# Altium PCB PCBCaneca-smart V2.PcbDoc
Units mm, origin at the board's own origin, x right, y up, seen from the top; angles counter-clockwise.
Board outline 88 x 105 mm, 4 copper layers (Top Layer, GND, VCC, Bottom Layer), stack 1.587 mm thick; 96 components, 50 nets, 244 pads, 111 vias.
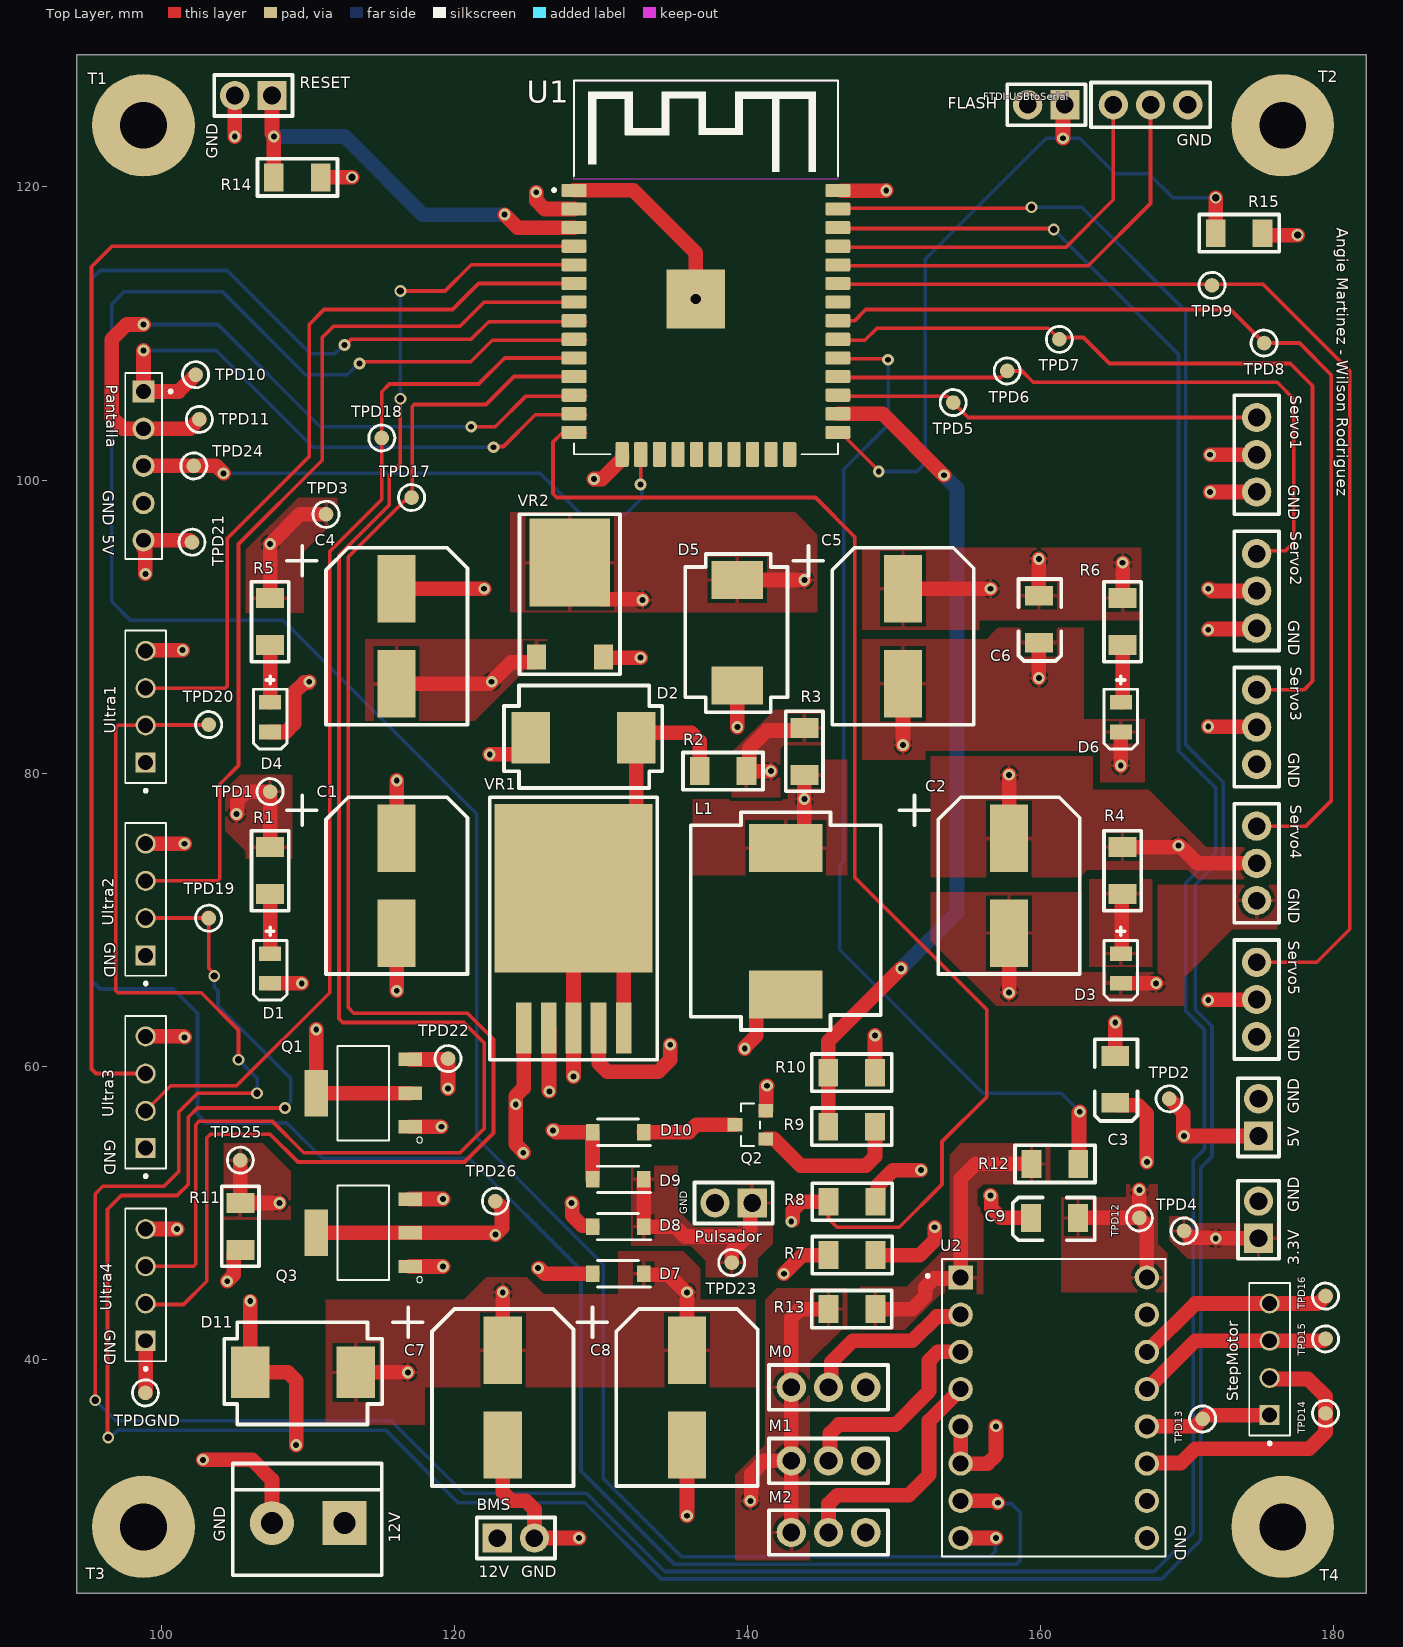
[diagram p0: Top Layer view]
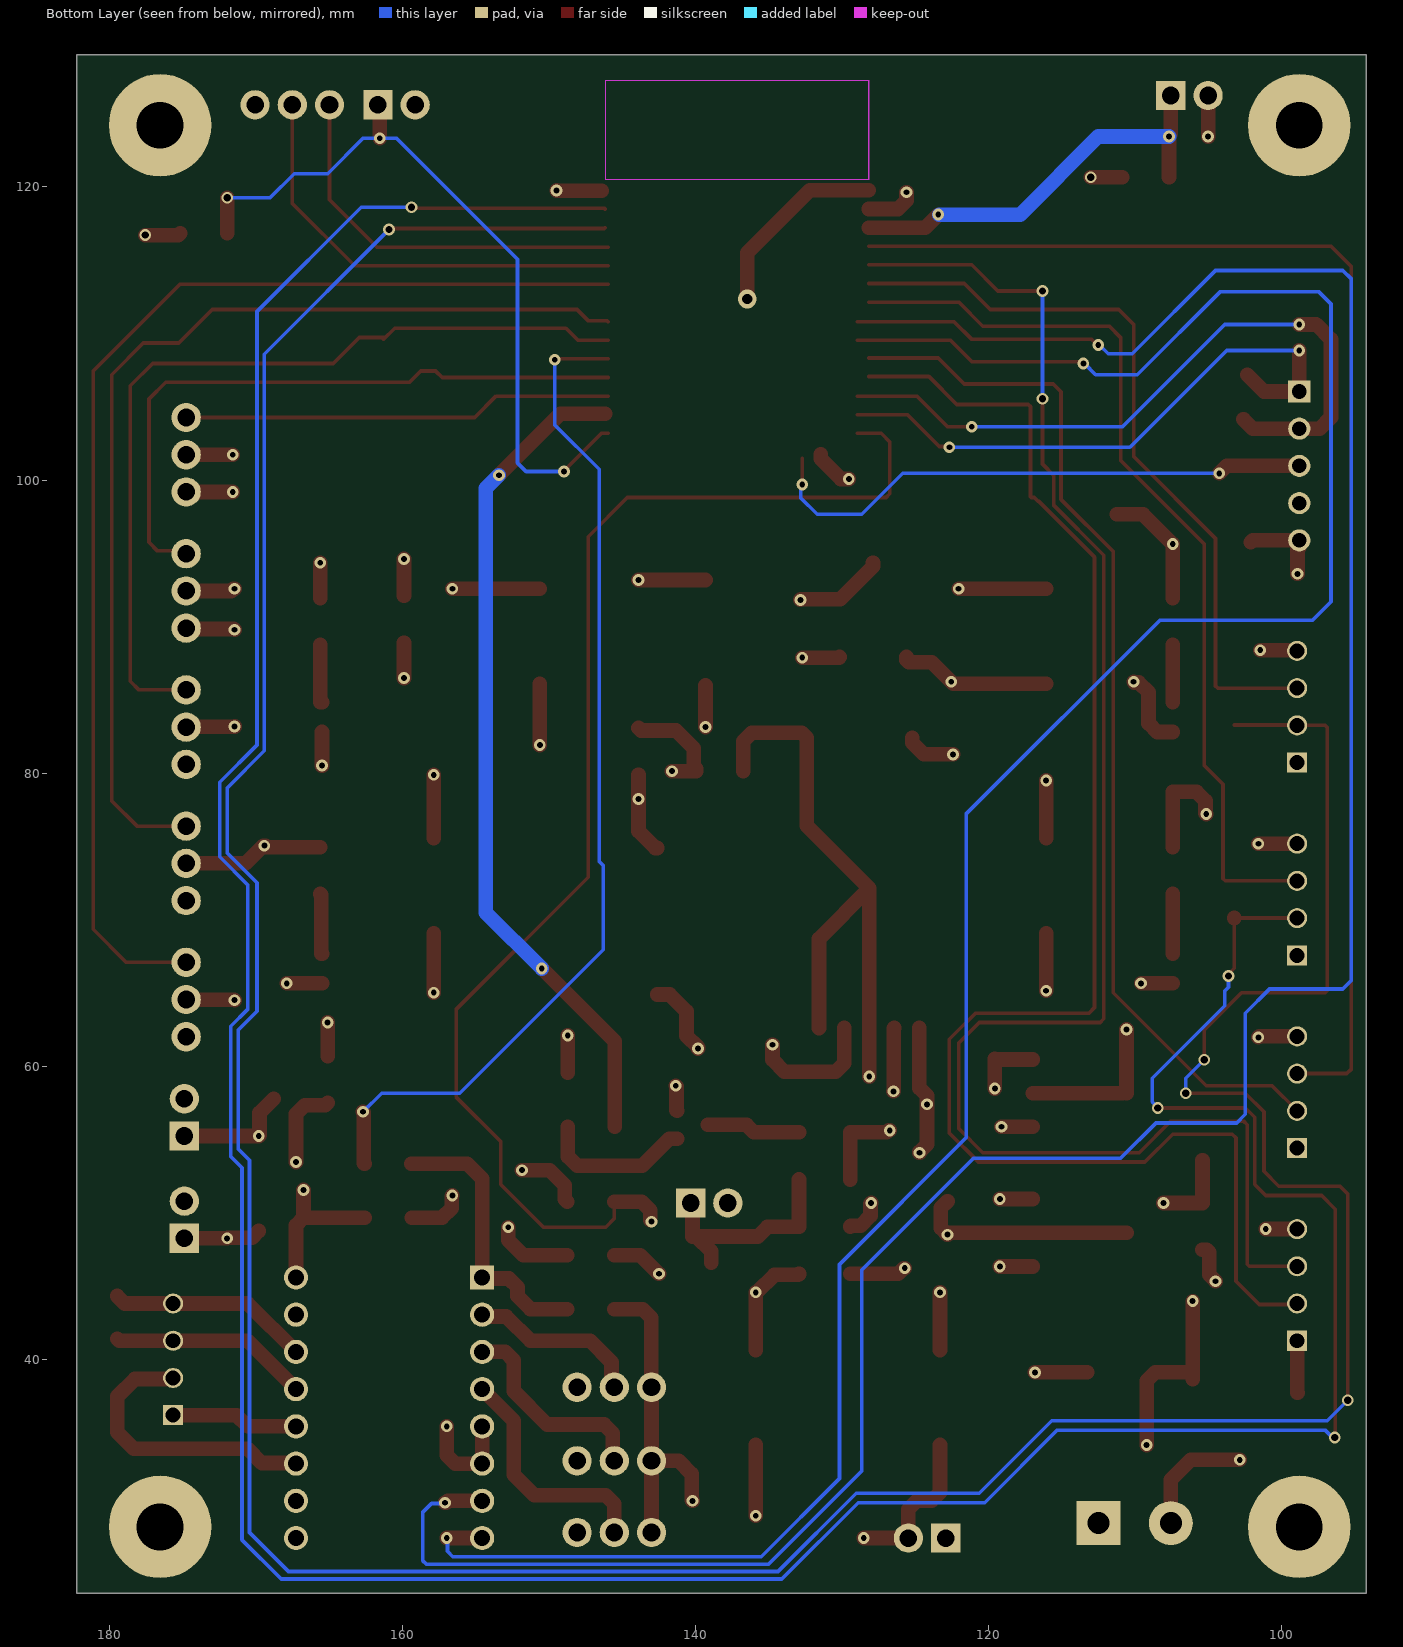
[diagram p1: Bottom Layer view, seen from below]
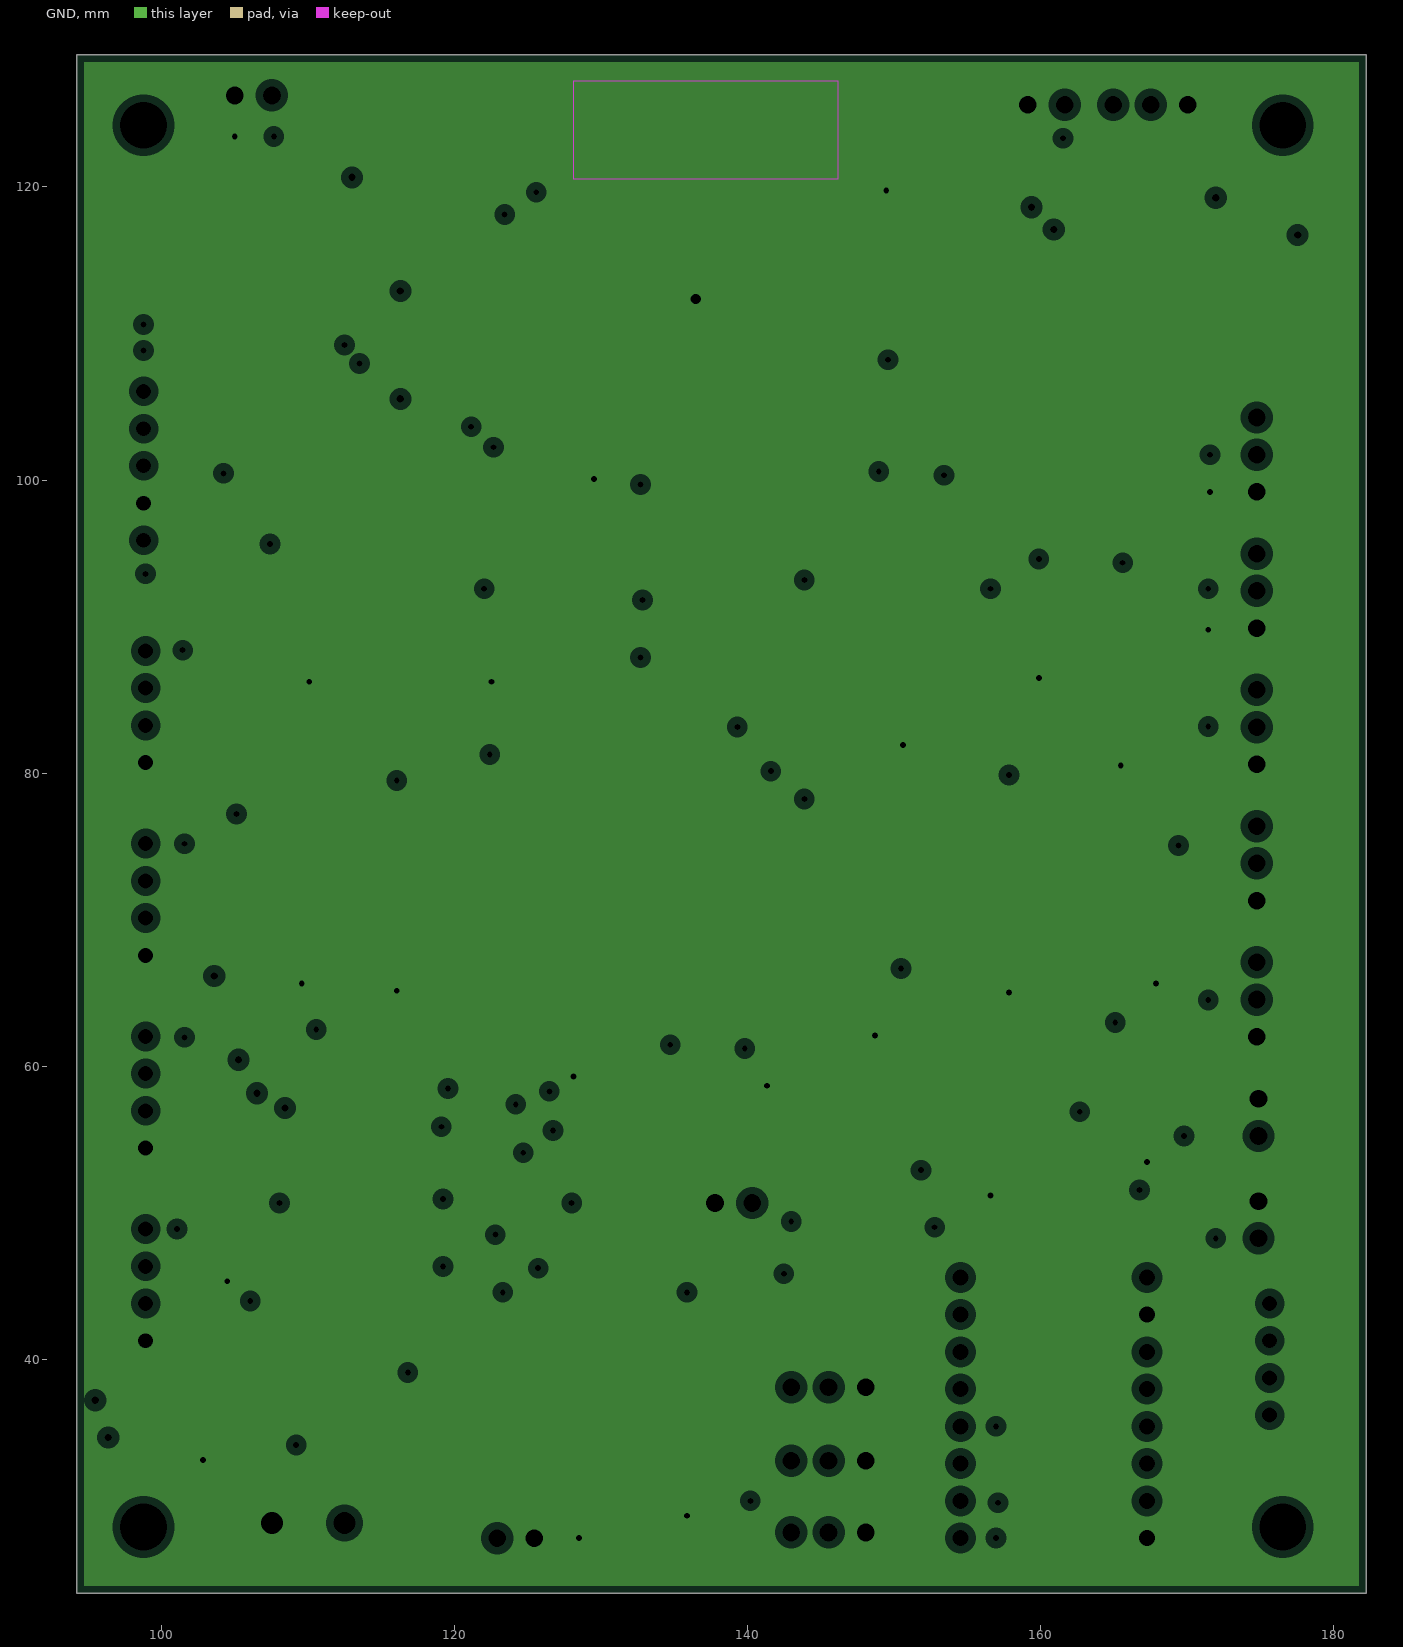
[diagram p2: GND, clearances drawn from the general rule]
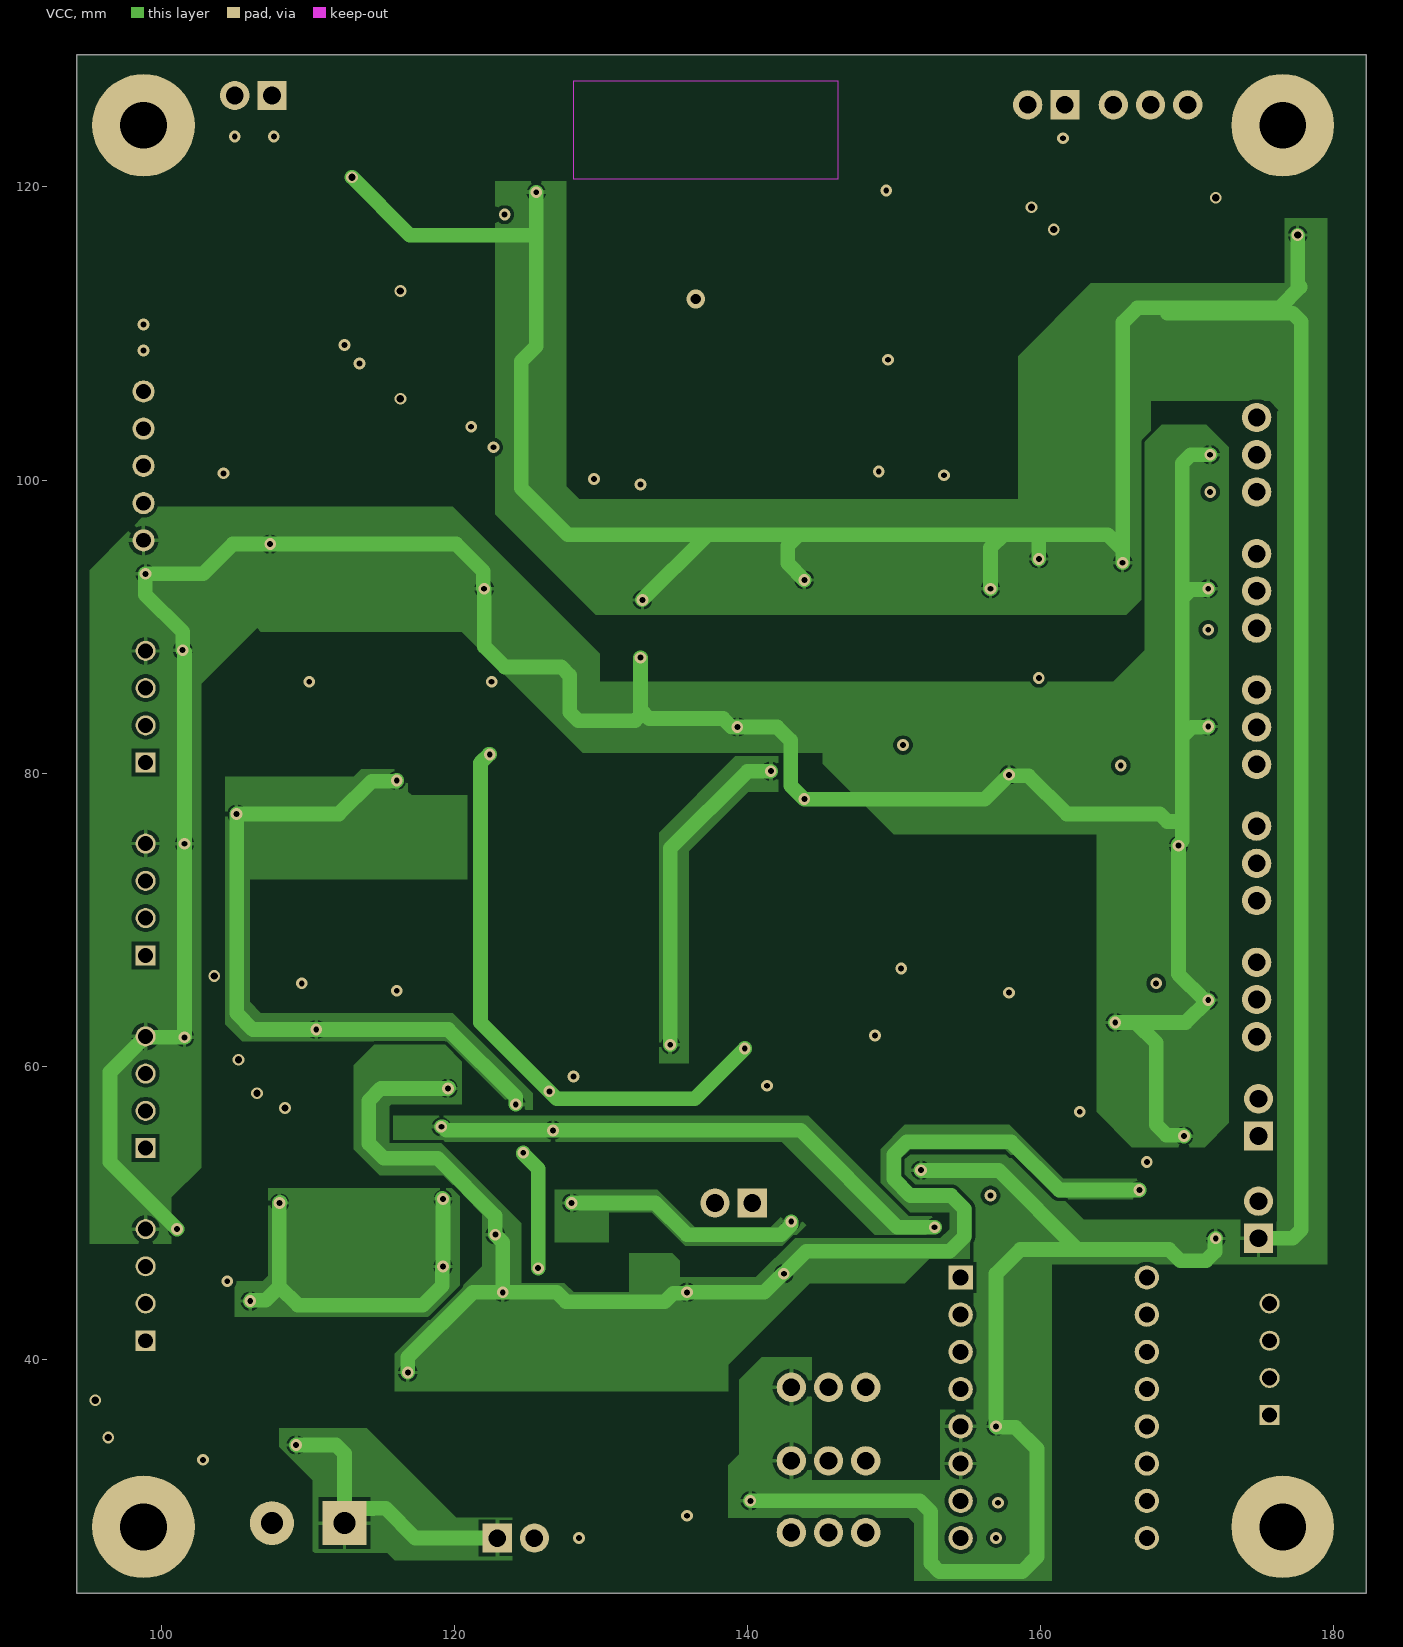
[diagram p3: VCC]
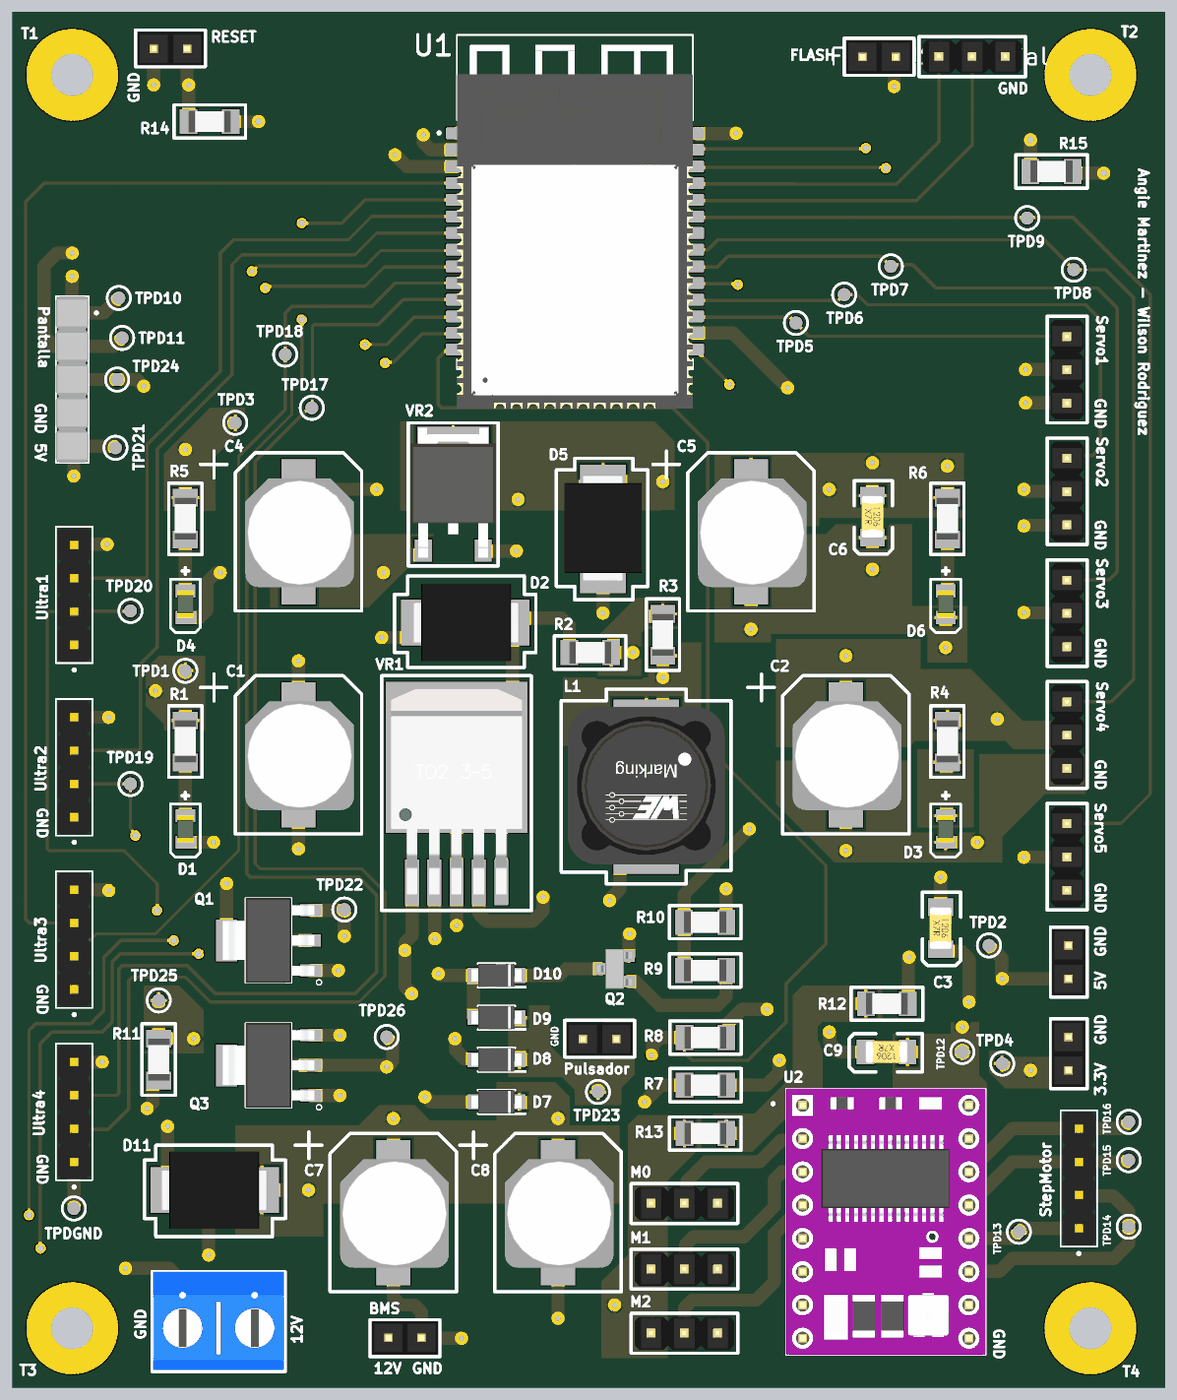
[diagram p4: 3D render of the assembled board from above, using the file's embedded part models]

## Layer stack, top to bottom
Top Solder: solder mask 0.0102, Solder Resist, Dk 3.5
Top Layer: signal copper 0.0356
Dielectric 2: prepreg 0.2103, PP-006, Dk 4.1
GND: plane copper 0.0152, net GND
Dielectric 1: prepreg 1.065, PP-006, Dk 4.1
VCC: signal copper 0.0152
Dielectric 3: prepreg 0.2103, PP-006, Dk 4.1
Bottom Layer: signal copper 0.0356
Bottom Solder: solder mask 0.0102, Solder Resist, Dk 3.5

## Board outline
94.234,24.032 94.234,129.032 182.234,129.032 182.234,24.032

## Design rules (kind name [scope] priority, off if disabled: settings)
Clearance [All] p1: gap=0.254 ignorepadtopadclearanceinfootprint=FALSE
HoleSize [All] p1: absolutevalues=TRUE maxlimit=4 minlimit=0.025 maxpercent=80.000 minpercent=20.000
MinimumSolderMaskSliver [All] p1: minsoldermaskwidth=0.1
PlaneClearance [All] p1: clearance=0.508
PlaneConnect [All] p1: planeconnectstyle=Relief reliefexpansion=0.508 reliefentries=4 reliefconductorwidth=0.254 reliefairgap=0.254
PolygonConnect [All] p1: connectstyle=Relief reliefconductorwidth=0.254 reliefentries=4 polygonreliefangle="90 Angle" airgapwidth=0.254
RoutingVias [All] p1: holewidth=0.4 width=0.8 viastyle="Through Hole" minholewidth=0.5 minwidth=0.55 maxholewidth=6.3 maxwidth=6.5
SilkToSolderMaskClearance [IsPad] p1: minsilkscreentomaskgap=0.15 clearancetoexposedcopper=TRUE
SolderMaskExpansion [All] p1: expansion=0.102 istentingtop=FALSE
Width [All] p1: maxlimit=1 minlimit=0.2 preferedwidth=0.25
25 further rules are at their usual default settings.

## Components (designator, comment, footprint, x,y, rotation, side; value= is the part's Value field where it differs from the comment)
3.3V "Header 1*2" "Header 1X2" 174.879,48.26 r90 top
5V "Header 1*2" "Header 1X2" 174.879,55.245 r90 top
12V "Borne2p" "Terminal block 1x2 izq" 107.569,28.829 r0 top
BMS "Header 1*2" "Header 1X2" 122.936,27.813 r0 top
C1 "CIN" "CAPACITOR ALUMINUM" 116.078,75.565 r0 top value=100uF
C2 "COUT" "CAPACITOR ALUMINUM" 157.861,75.565 r0 top value=220uF
C3 "COUT" CC1206 165.1,60.706 r270 top value=0.1uF
C4 "CIN" "CAPACITOR ALUMINUM" 116.078,92.583 r0 top value=100uF
C5 "COUT" "CAPACITOR ALUMINUM" 150.622,92.583 r0 top value=220uF
C6 "COUT" CC1206 159.893,92.1 r270 top value=0.1uF
C7 "" "CAPACITOR ALUMINUM" 123.317,40.64 r0 top value=220uF
C8 "" "CAPACITOR ALUMINUM" 135.89,40.64 r0 top value=100uF
C9 "" CC1206 162.56,49.657 r180 top value=0.1uF
D1 "LED1" "LED 0805" 107.442,67.691 r270 top
D2 "SS34" "SS34 DIODE" 132.422,82.423 r180 top
D3 "LED2" "LED 0805" 165.481,67.691 r270 top
D4 "LED1" "LED 0805" 107.442,84.836 r270 top
D5 "SS34" "SS34 DIODE" 139.319,93.179 r270 top
D6 "LED2" "LED 0805" 165.481,84.836 r270 top
D7 "1N4007W-T" SODFL3818X130N 131.191,45.847 r180 top
D8 "1N4007W-T" SODFL3818X130N 131.191,49.064 r180 top
D9 "1N4007W-T" SODFL3818X130N 131.191,52.282 r180 top
D10 "1N4007W-T" SODFL3818X130N 131.191,55.499 r180 top
D11 "SS34" "SS34 DIODE" 106.084,39.116 r0 top
FLASH "Header 1*2" "Header 1X2" 161.671,125.603 r180 top
FTDI-USBtoSerial "Header 3" "header 1x3" 164.973,125.603 r0 top
L1 "Inductor" INDUCTOR 142.621,64.897 r90 top value=47mH
M0 "Header 3" "header 1x3" 143.002,38.1 r0 top
M1 "Header 3" "header 1x3" 143.002,33.084 r0 top
M2 "Header 3" "header 1x3" 143.002,28.194 r0 top
Pantalla "Header 5" "HEADER X 5" 98.806,100.965 r270 top
Pulsador "Header 1*2" "Header 1X2" 140.335,50.673 r180 top
Q1 "FDT434P" SOT230P700X180-4N 113.792,58.166 r90 top
Q2 "MMBT3904" MMBT3904 140.208,56.007 r0 top
Q3 "FDT434P" SOT230P700X180-4N 113.792,48.641 r90 top
R1 "Res1" "RESISTOR 1206" 107.442,71.755 r90 top value=330
R2 "Res1" "RESISTOR 1206" 136.754,80.137 r0 top value=1K
R3 "Res1" "RESISTOR 1206" 143.891,83.083 r270 top value=3K
R4 "Res1" "RESISTOR 1206" 165.608,71.755 r90 top value=330
R5 "Res1" "RESISTOR 1206" 107.442,88.748 r90 top value=1K
R6 "Res1" "RESISTOR 1206" 165.608,88.748 r90 top value=1K
R7 "Res1" "RESISTOR 1206" 148.742,47.117 r180 top value=10K
R8 "Res1" "RESISTOR 1206" 148.742,50.758 r180 top value=10K
R9 "Res1" "RESISTOR 1206" 148.717,55.88 r180 top value=220
R10 "Res1" "RESISTOR 1206" 148.717,59.563 r180 top value=10K
R11 "Res1" "RESISTOR 1206" 105.41,50.673 r270 top value=100K
R12 "Res1" "RESISTOR 1206" 162.585,53.34 r180 top value=100
R13 "Res1" "RESISTOR 1206" 145.542,43.434 r0 top value=10K
R14 "Res1" "RESISTOR 1206" 110.896,120.65 r180 top value=10K
R15 "Res1" "RESISTOR 1206" 175.158,116.84 r180 top value=10K
RESET "Header 1*2" "Header 1X2" 107.569,126.238 r180 top
Servo1 "Header 3" "header 1x3" 174.752,99.187 r90 top
Servo2 "Header 3" "header 1x3" 174.752,89.894 r90 top
Servo3 "Header 3" "header 1x3" 174.752,80.602 r90 top
Servo4 "Header 3" "header 1x3" 174.752,71.309 r90 top
Servo5 "Header 3" "header 1x3" 174.752,62.016 r90 top
StepMotor "Header 4" "HEADER 1X4" 175.641,36.195 r90 top
T1 "Tornillo" TORNILLO 98.806,124.206 r0 top
T2 "Tornillo" TORNILLO 176.53,124.206 r0 top
T3 "Tornillo" TORNILLO 98.806,28.575 r0 top
T4 "Tornillo" TORNILLO 176.53,28.575 r0 top
TPD1 "" "TESTPOINT SMT" 107.442,78.74 r90 top
TPD2 "" "TESTPOINT SMT" 168.783,57.785 r90 top
TPD3 "" "TESTPOINT SMT" 111.252,97.663 r90 top
TPD4 "" "TESTPOINT SMT" 169.799,48.768 r90 top
TPD5 "" "TESTPOINT SMT" 154.051,105.283 r90 top
TPD6 "" "TESTPOINT SMT" 157.734,107.442 r90 top
TPD7 "" "TESTPOINT SMT" 161.29,109.601 r90 top
TPD8 "" "TESTPOINT SMT" 175.26,109.347 r90 top
TPD9 "" "TESTPOINT SMT" 171.704,113.284 r90 top
TPD10 "" "TESTPOINT SMT" 102.362,107.188 r90 top
TPD11 "" "TESTPOINT SMT" 102.616,104.14 r90 top
TPD12 "" "TESTPOINT SMT" 166.751,49.657 r90 top
TPD13 "" "TESTPOINT SMT" 171.069,35.941 r90 top
TPD14 "" "TESTPOINT SMT" 179.451,36.322 r90 top
TPD15 "" "TESTPOINT SMT" 179.451,41.402 r90 top
TPD16 "" "TESTPOINT SMT" 179.451,44.323 r90 top
TPD17 "" "TESTPOINT SMT" 117.094,98.806 r90 top
TPD18 "" "TESTPOINT SMT" 115.062,102.87 r90 top
TPD19 "" "TESTPOINT SMT" 103.251,70.104 r90 top
TPD20 "" "TESTPOINT SMT" 103.251,83.312 r90 top
TPD21 "" "TESTPOINT SMT" 102.108,95.758 r90 top
TPD22 "" "TESTPOINT SMT" 119.578,60.523 r90 top
TPD23 "" "TESTPOINT SMT" 138.938,46.609 r90 top
TPD24 "" "TESTPOINT SMT" 102.235,100.965 r90 top
TPD25 "" "TESTPOINT SMT" 105.41,53.594 r90 top
TPD26 "" "TESTPOINT SMT" 122.809,50.8 r90 top
TPDGND "" "TESTPOINT SMT" 98.933,37.719 r90 top
U1 "ESP-WROOM-32" MODULE_ESP-WROOM-32 137.177,111.506 r0 top
U2 "DRV8825_STEPPER_MOTOR_DRIVER_CARRIER" IC_DRV8825_STEPPER_MOTOR_DRIVER_CARRIER 160.909,36.703 r0 top
Ultra1 "Header 4" "HEADER 1X4" 98.953,80.723 r90 top
Ultra2 "Header 4" "HEADER 1X4" 98.953,67.574 r90 top
Ultra3 "Header 4" "HEADER 1X4" 98.953,54.424 r90 top
Ultra4 "Header 4" "HEADER 1X4" 98.953,41.275 r90 top
VR1 "LM2596S-ADJ" lm2596S 128.143,62.992 r270 top
VR2 "LM1117DT-3.3" LM1117DT-3.3 127.889,94.361 r0 top

## Footprints (in the part's own frame and the unit in brackets; to place one, negate y for a bottom-side part, rotate by r counter-clockwise, add the part's x,y. Pads: shape width x height; smd on the part's side, far side on the other; paste and mask are expansions set on the pad)
"CAPACITOR ALUMINUM" [mm]
  rect 2.6x4.6 smd: 1(0,0) 2(0,-6.477)
  silkscreen extent -7.49,-9.27 4.83,2.92, body extent -4.06,-7.45 4.24,0.85, height 12
CC1206 [mm]
  rect 1.35x1.9 smd: 1(0,0) 2(3.2,0)
  silkscreen extent -1.14,-1.4 4.44,1.52, body extent 0,-0.85 3.2,0.85, height 1.7
"Header 1X2" [mm]
  rect 2x2 hole 1.2: 1(0,0)
  round 2 hole 1.2: 2(2.54,0)
  silkscreen extent -1.4,-1.4 3.94,1.4, body extent -1.27,-1.24 3.81,1.3, height 2.09
"header 1x3" [mm]
  round 2 hole 1.2: 1(0,0) 2(2.54,0) 3(5.08,0)
  silkscreen extent -1.52,-1.52 6.6,1.52, body extent -1.27,-1.27 6.35,1.27, height 9.2
"HEADER 1X4" [mm]
  rect 1.37x1.37 hole 1.02: 1(0,0)
  round 1.37 hole 1.02: 2(2.54,0) 3(5.08,0) 4(7.62,0)
  silkscreen extent -2.02,-1.4 9.02,1.4, body extent -1.27,-1.27 8.89,1.27, height 8.89
"HEADER X 5" [mm]
  rect 1.508x1.508 / inner round 1.508 / far side rect 1.508x1.508 hole 1: 1(-5.08,0)
  round 1.508 hole 1: 2(-2.54,0) 3(0,0) 4(2.54,0) 5(5.08,0)
  silkscreen extent -6.35,-1.25 6.35,1.95, body extent -6.35,-1.25 6.35,1.25, height 8.85
IC_DRV8825_STEPPER_MOTOR_DRIVER_CARRIER [mm]
  rect 1.65x1.65 hole 1.1: 1(-6.35,8.89)
  round 1.65 hole 1.1: 2(-6.35,6.35) 3(-6.35,3.81) 4(-6.35,1.27) 5(-6.35,-1.27) 6(-6.35,-3.81) 7(-6.35,-6.35) 8(-6.35,-8.89) 9(6.35,-8.89) 10(6.35,-6.35) 11(6.35,-3.81) 12(6.35,-1.27) 13(6.35,1.27) 14(6.35,3.81) 15(6.35,6.35) 16(6.35,8.89)
  silkscreen extent -8.7,-10.16 7.62,10.16, body extent -7.62,-10.16 7.62,10.16, height 5.89
INDUCTOR [mm]
  rect 3.3x5 smd: 1(0,0) 2(10,0)
  silkscreen extent -2.41,-6.48 12.45,6.48, body extent -0.92,-6 11.08,6, height 9.46
"LED 0805" [mm]
  rect 1x1.5 smd: 1(0,0) 2(2.032,0)
  silkscreen extent -1.78,-1.14 3.17,1.14, body extent 0,-0.64 2.03,0.64, height 1.1
LM1117DT-3.3 [mm]
  rect 1.3x1.7 smd: 1(-2.286,-6.44) 3(2.286,-6.44)
  rect 5.5x6 smd: 2(0,0)
  silkscreen extent -3.43,-7.62 3.43,3.3, body extent -3.29,-6.99 3.29,2.92, height 2.5
lm2596S [mm]
  rect 3.5x1.07 smd: 1(0.381,-3.4) 2(0.381,-1.7) 3(0.381,0) 4(0.381,1.7) 5(0.381,3.429)
  rect 11.5x10.8 smd: 6(-9.144,0)
  silkscreen extent -15.37,-5.72 2.54,5.72, body extent -14.36,-5 1.31,5, height 4.78
MMBT3904 [mm]
  rect 1x0.9 smd: 1(1.05,-0.96) 2(1.05,0.96) 3(-1.05,0)
  silkscreen extent -0.65,-1.45 0.65,1.45, body extent -1.3,-1.52 1.3,1.52, height 1.28
MODULE_ESP-WROOM-32 [mm]
  rrect22% 1.7x0.9 smd: 1(-9,8.255) 2(-9,6.985) 3(-9,5.715) 4(-9,4.445) 5(-9,3.175) 6(-9,1.905) 7(-9,0.635) 8(-9,-0.635) 9(-9,-1.905) 10(-9,-3.175) 11(-9,-4.445) 12(-9,-5.715) 13(-9,-6.985) 14(-9,-8.255) 25(9,-8.255) 26(9,-6.985) 27(9,-5.715) 28(9,-4.445) 29(9,-3.175) 30(9,-1.905) 31(9,-0.635) 32(9,0.635) 33(9,1.905) 34(9,3.175) 35(9,4.445) 36(9,5.715) 37(9,6.985) 38(9,8.255)
  rect 4x4 smd: 1.1(-0.7,0.845)
  rrect22% 0.9x1.7 smd: 15(-5.715,-9.755) 16(-4.445,-9.755) 17(-3.175,-9.755) 18(-1.905,-9.755) 19(-0.635,-9.755) 20(0.635,-9.755) 21(1.905,-9.755) 22(3.175,-9.755) 23(4.445,-9.755) 24(5.715,-9.755)
  Keep-Out Layer region: 9,9.012 -9.012,9.012 -9.012,15.75 9,15.75
  Keep-Out Layer region: 9,9.026 -9.026,9.026 -9.026,15.75 9,15.75
  silkscreen extent -10.46,-9.75 9,15.75, body extent -9,-12.75 9,12.75, height 3.25
"RESISTOR 1206" [mm]
  rect 1.35x1.9 smd: 1(0,0) 2(3.2,0)
  silkscreen extent -1.14,-1.27 4.32,1.27, body extent 0,-0.83 3.2,0.83, height 0.53
SODFL3818X130N [mm]
  rect 0.92x1.13 smd: 1(-1.75,0) 2(1.75,0)
  silkscreen extent -2.21,-0.9 1.4,0.9, body extent -1.9,-0.9 1.9,0.9, height 1.3
SOT230P700X180-4N [mm]
  rect 0.92x1.61 smd: 1(-2.3,-3.2) 2(0,-3.2) 3(2.3,-3.2)
  rect 3.19x1.61 smd: 4(0,3.2)
  silkscreen extent -3.4,-4.05 3.22,1.75, body extent -3.25,-3.5 3.25,3.5, height 1.8
"SS34 DIODE" [mm]
  rect 2.6x3.5 smd: 1(0,0) 2(7.2,0)
  silkscreen extent -1.78,-3.56 9.02,3.43, body extent -0.48,-2.95 7.59,2.95, height 2.53
"Terminal block 1x2 izq" [mm]
  rect 3x3 hole 1.5: 1(4.953,0)
  round 3 hole 1.5: 2(0,0)
  silkscreen extent -2.67,-3.56 7.49,4.06, body extent -2.59,-3.44 7.41,4.06, height 10
"TESTPOINT SMT" [mm] "Test Point, Dia 3.17mm"
  round 1 smd: 1(0,0)
  silkscreen extent -0.89,-0.89 0.89,0.89
TORNILLO [mm]
  round 7 hole 3.2: 1(0,0)

## Part data
12V: library part "Header 2", "Header, 2-Pin", LatestRevisionDate=17-Jul-2002, LatestRevisionNote="Re-released for DXP Platform.", Publisher="Altium Limited"
C1 C4 C8: library part "Cap Pol1", "Polarized Capacitor (Radial)", LatestRevisionDate=17-Jul-2002, LatestRevisionNote="Re-released for DXP Platform.", PackageDescription="Polarized Capacitor (Radial); 2 Leads", PackageReference=RB7.6-15, Published=8-Jun-2000, Publisher="Altium Limited"
C2 C5 C7: library part "Cap Pol1_1", "Polarized Capacitor (Radial)", LatestRevisionDate=17-Jul-2002, LatestRevisionNote="Re-released for DXP Platform.", PackageDescription="Polarized Capacitor (Radial); 2 Leads", PackageReference=RB7.6-15, Published=8-Jun-2000, Publisher="Altium Limited"
C3 C6 C9: library part "Cap Pol1_2", "Polarized Capacitor (Radial)", LatestRevisionDate=17-Jul-2002, LatestRevisionNote="Re-released for DXP Platform.", PackageDescription="Polarized Capacitor (Radial); 2 Leads", PackageReference=RB7.6-15, Published=8-Jun-2000, Publisher="Altium Limited"
D1: library part LED0_1, "Typical INFRARED GaAs LED", LatestRevisionDate=08-Jul-2005, LatestRevisionNote="Mech Layer 1 removed.", PackageDescription="LED; 2 Leads", PackageReference=LED-0, Published=8-Jun-2000, Publisher="Altium Limited"
D2 D5 D11: library part CMP-02539-000012-1, "DIODE SCHOTTKY 40V 3A DO214AB", Forward Current=3A, Manufacturer=Vishay, Manufacturer Part Number=SS34-E3/57T, Max Junction Temp=+150°C, Max Repetitive Reverse Voltage=40V, Max Surge Forward Current=100A, Package=95402, Peak Reverse Current=0.5mA, Temperature="-55°C to +150°C", Temperature Range Low=-55°C, Automotive=No, Category=Diode, ComponentLink2Description=Datasheet, ComponentLink2URL=http://www.vishay.com/docs/88751/ss32.pdf, Device Class L1="Discrete Semiconductors", Device Class L2=Diodes, Device Class L3="Schottky Diodes", Digikey Description="DIODE SCHOTTKY 40V 3A DO214AB", Footprint Url=http://www.vishay.com/docs/95402/smc.pdf, Height=2.62mm, Lead Free=Yes, Mouser Description="Schottky Diodes & Rectifiers 3.0 Amp 40 Volt", Octopart=https://octopart.com/ss34-e3%2F57t-vishay-39552907, RoHS=TRUE, Standoff Height=0mm, Temperature Range High=+150°C
D3 D4 D6: library part LED0, "Typical INFRARED GaAs LED", LatestRevisionDate=08-Jul-2005, LatestRevisionNote="Mech Layer 1 removed.", PackageDescription="LED; 2 Leads", PackageReference=LED-0, Published=8-Jun-2000, Publisher="Altium Limited"
D7 D8 D9 D10: "STANDARD SOD123FL T/R 3000", Package="DO-214AA-214 EIC", Check_prices=https://www.snapeda.com/parts/1N4007W/EIC+Semiconductor/view-part/?ref=eda, MF=EIC, MP=1N4007W, SnapEDA_Link=https://www.snapeda.com/parts/1N4007W/EIC+Semiconductor/view-part/?ref=snap
Pantalla: "Board-To-Board Connector, Through Hole, Header, 5, 2.54 mm, Gold Plated Contacts", Package=None, Check_prices=https://www.snapeda.com/parts/826646-5/TE+Connectivity+AMP+Connectors/view-part/?ref=eda, EU_RoHS_Compliance=Compliant, MF="TE Connectivity", MP=826646-5, SnapEDA_Link=https://www.snapeda.com/parts/826646-5/TE+Connectivity+AMP+Connectors/view-part/?ref=snap
Q1 Q3: "P-Channel 20 V 6A (Ta) 3W (Ta) Surface Mount SOT-223-4", Package="SOT-223-4 Fairchild Semiconductor", Check_prices=https://www.snapeda.com/parts/FDT434P/Onsemi/view-part/?ref=eda, MF=ON, MP=FDT434P, SnapEDA_Link=https://www.snapeda.com/parts/FDT434P/Onsemi/view-part/?ref=snap
R1 R4: library part Res1_2, "Resistor", LatestRevisionDate=17-Jul-2002, LatestRevisionNote="Re-released for DXP Platform.", PackageDescription="Axial Device, Thru-Hole; 2 Leads; 0.3 in Pin Spacing", PackageReference=AXIAL-0.3, Published=8-Jun-2000, Publisher="Altium Limited"
R2 R5 R6 R7 R8 R9 R10 R11 R12 R13 R14 R15: "Resistor", LatestRevisionDate=17-Jul-2002, LatestRevisionNote="Re-released for DXP Platform.", PackageDescription="Axial Device, Thru-Hole; 2 Leads; 0.3 in Pin Spacing", PackageReference=AXIAL-0.3, Published=8-Jun-2000, Publisher="Altium Limited"
R3: library part Res1_1, "Resistor", LatestRevisionDate=17-Jul-2002, LatestRevisionNote="Re-released for DXP Platform.", PackageDescription="Axial Device, Thru-Hole; 2 Leads; 0.3 in Pin Spacing", PackageReference=AXIAL-0.3, Published=8-Jun-2000, Publisher="Altium Limited"
StepMotor Ultra1 Ultra2 Ultra3 Ultra4: Package=None, Availability=Unavailable, MF="{'manufacturer': 'TE Connectivity'}", MP=640453-4, Price=None
TPD1 TPD2 TPD3 TPD4 TPD5 TPD6 TPD7 TPD8 TPD9 TPD10 TPD11 TPD12 TPD13 TPD14 TPD15 TPD16 TPD17 TPD18 TPD19 TPD20 TPD21 TPD22 TPD23 TPD24 TPD25 TPD26 TPDGND: library part TestPointRed, "Test Point, Red, Through Hole, RoHS, Bulk", Colour=Red, Manufacturer=Keystone, Package Quantity=100, ComponentLink1Description="Manufacturer URL", ComponentLink1URL=http://www.keyelco.com/, ComponentLink2Description=Datasheet, ComponentLink2URL=http://www.keyelco.com/product-pdf.cfm?p=1319, Contact Material=Bronze, Contact Plating=Silver, DatasheetVersion="Rev. F, 12/2013", Height="8.12 mm", Mount="Through Hole", Mounting Technology="Through Hole", PackageDescription="1-Pin Through Hole Device, Dia 3.17 mm", PackageReference=5010, Packaging=Bulk, Pins=1, REACH SVHC="No SVHC", RoHSCompliant=true
U1: "Transceptor serie ESP-WROOM-32; Placa de evaluaciÃ³n 802.11 b/g/n (Wi-Fi, WiFi, WLAN), BluetoothÂ® Smart 4.x de bajo consumo (BLE)", Package="Module Espressif Systems", Check_prices=https://www.snapeda.com/parts/ESP-WROOM-32/Espressif+Systems/view-part/?ref=eda, MF="Espressif Systems", MP=ESP-WROOM-32, SnapEDA_Link=https://www.snapeda.com/parts/ESP-WROOM-32/Espressif+Systems/view-part/?ref=snap
U2: "Stepper motor controler; IC: DRV8825; 1.5A; Uin mot: 8.2Ã·45V", Package=None, Availability=Unavailable, MP=DRV8825_STEPPER_MOTOR_DRIVER_CARRIER, Price=None
VR1: "SIMPLE SWITCHER® Power Converter 150 KHz 3A Step-Down Voltage Regulator, 5-pin TO-263", Manufacturer="National Semiconductor", Manufacturer Part Number=LM2596SADJ, PackageTopMarking="NSUZXYTTE#*LM2596S*-ADJ P+", PowerWise=N, Code_JEDEC=MO-169-AB, ComponentLink1Description="LM2596 Datasheet", ComponentLink1URL=http://www.national.com/ds/LM/LM2596.pdf, ComponentLink2Description="LM2596 Web Page", ComponentLink2URL=http://www.national.com/pf/LM/LM2596.html, ComponentLink3Description="TS5B Package Page", ComponentLink3URL=http://www.national.com/packaging/folders/ts5b.html, CompType=Switcher, DatasheetVersion=May-2002, PackageDescription="TO-263, Molded, .400 x .390 x .180in, 5 Lead, .067in Pitch, Surface Mount", PackageReference=TS5B, PackageVersion="revD, Apr-2005", PinCount=5, RevisionNote="Component URLs added", RoHS=N
VR2: "800mA Low-Dropout Linear Regulator, 3-pin TO-252", Manufacturer="National Semiconductor", PackageTopMarking=NSUZXYTT*LM1117*DT-3.3, PowerWise=N, Code_JEDEC=TO-252-AA, ComponentLink1Description="LM1117 Datasheet", ComponentLink1URL=http://www.national.com/ds/LM/LM1117.pdf, ComponentLink2Description="LM1117 Web Page", ComponentLink2URL=http://www.national.com/pf/LM/LM1117.html, ComponentLink3Description="TD03B Package Page", ComponentLink3URL=http://www.national.com/packaging/folders/td03b.html, CompType="LDO IC", DatasheetVersion=Apr-2006, Manufacturer Part Number=LM1117DT-3.3, PackageDescription="TO252, Molded, Jedec, 6.8 x 6.10 x 2.30mm Body, 3 Lead, 2.28mm Pitch, Surface Mount", PackageReference=TD03B, PackageVersion="revD, Feb-2009", PinCount=3, RevisionNote="Component URLs added", RoHS=N
L1: Code_IEC=1005, Code_JEITA=0402, LatestRevisionDate=29-May-2009, LatestRevisionNote="IPC-7351 Footprint Added.", PackageDescription="Chip Inductor", PackageReference=0402-A, Published=8-Jun-2000, Publisher="Altium Limited"
Q2: Check_prices=https://www.snapeda.com/parts/MMBT3904/STMicroelectronics/view-part/?ref=eda, SnapEDA_Link=https://www.snapeda.com/parts/MMBT3904/STMicroelectronics/view-part/?ref=snap

## Via types
v1: diameter 0.8, hole 0.4, Top Layer to Bottom Layer, 97 vias
v2: diameter 0.8, hole 0.5, Top Layer to Bottom Layer, 13 vias
v3: diameter 1.27, hole 0.711, Top Layer to Bottom Layer, 1 vias

## Nets (pads, with @x,y where several pads share a name; then routed paths per layer and width w, separated by ;. In a path a pad name is that pad's centre, name@x,y a point inside that pad or via, vN(x,y) a via of type N, cw(c..) or ccw(c..) an arc to the next point about the centre after c; other vN are vias at no path point)
3V3: 3.3V.1 C5.1 C6.1 D5.1 M0.1 M1.1 M2.1 R6.2 R8.1 R13.1 R14.1 R15.1 TPD4.1 U1.2 U2.5 U2.6 VR2.2 | length 344.7
  Top Layer w1: R14.1 v2(113.03,120.65) ; v1(125.603,119.634) 125.603,119.077 126.189,118.491 U1.2 ; VR2.2 127.889,94.111 130.139,91.861 132.802,91.861 v1(132.842,91.821) ; D5.1 v1(143.891,93.179) ; v1(140.208,30.353) 140.26,30.405 140.26,32.183 141.16,33.084 M1.1 M0.1 143.01,38.108 143.01,42.848 143.596,43.434 R13.1 ; M2.1 M1.1@143.002,33.02 ; R8.1 148.917,50.933 148.917,51.889 149.941,52.913 v1(151.846,52.913) ; C5.1 v1(156.591,92.583) ; U2.5 U2.6 156.386,32.893 156.972,33.479 v1(156.972,35.433) ; C6.1 v1(159.893,94.615) ; R6.2 v1(165.608,94.361) ; TPD4.1 170.255,48.312 171.906,48.312 v1(171.958,48.26) 3.3V.1 ; R15.1 175.285,116.713 v2(177.546,116.713)
  VCC w1: v2(113.03,120.65) 116.967,116.713 125.603,116.713 ; v1(125.603,119.634) 125.603,116.713 ; v1(132.842,91.821) 137.16,96.139 ; v1(140.208,30.353) 151.765,30.353 152.527,29.591 152.527,26.113 153.113,25.527 158.75,25.527 159.766,26.543 159.766,33.909 158.294,35.381 157.024,35.381 v1(156.972,35.433) 156.972,45.847 158.623,47.498 162.56,47.498 ; 143.383,96.139 142.748,95.504 142.748,94.322 v1(143.891,93.179) ; v1(151.846,52.913) 151.865,52.894 157.164,52.894 162.56,47.498 ; v1(156.591,92.583) 156.591,95.377 157.48,96.266 ; v1(159.893,94.615) 159.893,96.139 ; 165.556,95.302 164.592,96.266 157.48,96.266 ; v1(165.608,94.361) 165.608,110.744 166.624,111.76 176.319,111.76 177.734,113.174 177.546,113.362 v2(177.546,116.713) ; 168.656,111.379 177.214,111.379 177.8,110.793 177.8,48.846 177.214,48.26 3.3V.1 ; v1(171.958,48.26) 171.906,48.208 171.906,47.351 171.291,46.736 169.545,46.736 168.783,47.498 162.56,47.498 ; 125.603,116.713 125.603,109.12 124.587,108.104 124.587,99.441 127.762,96.266 157.48,96.266
5V: 5V.1 C2.1 C3.1 C4.1 D5.2 L1.2 Pantalla.5 R3.2 R4.2 R5.2 Servo1.2 Servo2.2 Servo3.2 Servo4.2 Servo5.2 TPD2.1 TPD3.1 TPD21.1 Ultra1.4 Ultra2.4 Ultra3.4 Ultra4.4 VR2.3 | length 282
  Top Layer w1: Pantalla.5@98.806,95.377 Pantalla.5 ; Pantalla.5@98.836,95.788 98.933,95.885 101.981,95.885 TPD21.1 ; v1(98.933,93.599) Pantalla.5@98.933,95.377 ; Ultra4.4 v1(101.092,48.895) ; Ultra3.4 101.532,62.044 v1(101.6,61.976) ; Ultra2.4 101.59,75.194 v1(101.6,75.184) ; Ultra1.4 99.002,88.392 v1(101.473,88.392) ; R5.2 v1(107.442,95.631) 109.474,97.663 TPD3.1 ; C4.1 v1(122.047,92.583) ; VR2.3 130.212,87.884 v1(132.715,87.884) ; v1(139.319,83.146) D5.2 ; L1.2 142.741,74.897 143.891,76.047 v1(143.891,78.232) R3.2 ; C2.1 v1(157.861,79.883) ; C3.1 v1(165.1,62.992) ; R4.2 169.243,74.955 169.345,75.057 v1(169.418,75.057) 169.491,75.057 170.699,73.849 Servo4.2 ; TPD2.1 169.747,56.821 169.747,55.297 v1(169.799,55.245) 5V.1 ; v1(171.45,64.516) 171.47,64.536 174.732,64.536 Servo5.2 ; v1(171.45,83.185) 171.472,83.163 174.73,83.163 Servo3.2 ; v1(171.45,92.583) 171.523,92.583 171.672,92.434 Servo2.2 ; v1(171.577,101.727) Servo1.2
  VCC w1: v1(101.092,48.895) 96.52,53.467 96.52,59.611 98.885,61.976 v1(101.6,61.976) 101.6,88.265 v1(101.473,88.392) 101.473,89.645 98.933,92.185 v1(98.933,93.599) 102.87,93.599 104.902,95.631 v1(107.442,95.631) 120.142,95.631 121.995,93.778 121.995,92.635 v1(122.047,92.583) 122.047,88.646 123.444,87.249 127.303,87.249 127.889,86.663 127.889,84.152 128.475,83.566 132.334,83.566 132.715,83.947 v1(132.715,87.884) ; 132.73,84.313 133.313,83.73 138.364,83.73 138.947,83.146 v1(139.319,83.146) 142.05,83.146 142.97,82.226 142.97,79.153 v1(143.891,78.232) 156.21,78.232 v1(157.861,79.883) 157.913,79.831 159.183,79.831 161.798,77.216 168.148,77.216 168.659,76.705 169.542,76.705 169.672,76.835 ; v1(165.1,62.992) 169.926,62.992 v1(171.45,64.516) 171.196,64.516 169.418,66.294 v1(169.418,75.057) 169.418,75.13 169.672,75.384 169.672,76.835 ; 166.549,62.94 167.894,61.595 167.894,56.007 168.604,55.297 169.747,55.297 v1(169.799,55.245) ; v1(171.45,83.185) 171.398,83.133 170.315,83.133 169.672,82.491 ; v1(171.45,92.583) 171.398,92.531 170.258,92.531 169.672,91.946 ; v1(171.577,101.727) 170.258,101.727 169.672,101.141 169.672,91.946 ; 169.672,76.835 169.672,82.491 ; 169.672,82.491 169.672,91.946
12V: C7.1 C8.1 C9.1 D7.1 D11.2 Q1.3 Q3.2 Q3.4 R7.2 TPD12.1 TPD22.1 TPD26.1 U2.16 | length 143.9
  Top Layer w1: Q3.4 122.682,48.641 v1(122.809,48.514) 123.268,48.973 123.268,50.341 TPD26.1 ; D11.2 v1(116.84,39.116) ; Q1.3 119.521,60.466 TPD22.1 v1(119.578,58.491) ; C7.1 v1(123.317,44.577) ; D7.1 132.941,45.822 132.981,45.782 134.612,45.782 135.817,44.577 v1(135.89,44.577) C8.1 ; v1(142.494,45.847) 143.764,47.117 R7.2 ; C9.1 TPD12.1 ; v1(166.751,51.562) TPD12.1 ; U2.16 167.259,49.149 TPD12.1
  VCC w1: v1(116.84,39.116) 116.842,39.118 116.842,40.134 121.285,44.577 v1(123.317,44.577) ; v1@119.629,58.542 v1(119.578,58.491) 115.006,58.491 114.173,57.658 114.173,54.737 115.189,53.721 118.872,53.721 122.809,49.784 v1(122.809,48.514) 123.317,48.006 v1(123.317,44.577) ; v1(166.751,51.562) 161.29,51.562 157.988,54.864 150.876,54.864 149.987,53.975 149.987,52.324 151.13,51.181 153.924,51.181 154.813,50.292 154.813,48.387 153.797,47.371 144.018,47.371 v1(142.494,45.847) 142.421,45.847 141.151,44.577 v1(135.89,44.577) 135.838,44.525 134.949,44.525 134.366,43.942 127.635,43.942 127,44.577 v1(123.317,44.577)
BUTTON12V: C1.1 D7.2 Q1.2 Q1.4 R1.2 TPD1.1 VR1.1 | length 90.1
  Top Layer w1: v1(105.156,77.216) 105.208,77.268 105.208,78.125 105.823,78.74 TPD1.1 R1.2 ; Q1.4 v1(110.592,62.509) ; Q1.4@110.897,58.166 Q1.2 ; C1.1 v1(116.078,79.502) ; v1@124.729,54.117 v1(124.714,54.102) 124.714,54.175 124.206,54.683 124.206,57.985 124.743,58.522 VR1.1 ; v1(125.73,46.228) 125.803,46.228 126.184,45.847 D7.2
  VCC w1: v1(116.078,79.502) 116.026,79.45 114.375,79.45 112.141,77.216 v1(105.156,77.216) 105.156,63.627 106.274,62.509 119.609,62.509 124.206,57.912 v1(124.206,57.404) ; v1(124.714,54.102) 124.714,54.029 125.73,53.013 v1(125.73,46.228)
EN: R14.2 RESET.1 U1.3 | length 28.6
  Top Layer w1: RESET.1 107.569,123.644 107.696,123.517 v1(107.696,123.444) R14.2 ; v1(123.444,118.11) 124.333,117.221 U1.3
  Bottom Layer w1: v1(107.696,123.444) 112.522,123.444 117.856,118.11 v1@123.371,118.11
GND: 3.3V.2 5V.2 12V.2 BMS.2 C1.2 C2.2 C3.2 C4.2 C5.2 C6.2 C7.2 C8.2 C9.2 D1.2 D2.1 D3.2 D4.2 D6.2 FLASH.2 FTDI-USBtoSerial.3 M0.3 M1.3 M2.3 Pantalla.4 Pulsador.2 Q2.2 R2.1 R10.1 R11.2 RESET.2 Servo1.1 Servo2.1 Servo3.1 Servo4.1 Servo5.1 TPDGND.1 U1.1 U1.1.1 U1.15 U1.38 U2.9 U2.15 Ultra1.1 Ultra2.1 Ultra3.1 Ultra4.1 VR1.3 VR1.5 VR1.6 VR2.1 | length 152.8
  Top Layer w1: TPDGND.1 98.953,37.739 Ultra4.1 ; Ultra3.1 99.104,54.424 Ultra3.1@99.138,54.39 ; v1(102.87,33.147) 106.221,33.147 107.569,31.799 12V.2 ; v1(104.521,45.339) 104.96,45.778 104.96,47.298 105.135,47.473 R11.2 ; v1(105.029,123.444) RESET.2 ; D1.2 v1(109.601,65.659) ; D4.2 108.507,82.804 109.093,83.39 109.093,85.512 109.762,86.181 110.057,86.181 v1(110.109,86.233) ; v1(116.078,65.151) C1.2 ; C4.2 122.428,86.106 123.893,87.571 125.453,87.571 125.603,87.721 VR2.1 ; C7.2 123.317,30.939 123.903,30.353 124.89,30.353 125.476,29.767 BMS.2 v1(128.524,27.813) ; v1(128.143,59.309) VR1.6 ; U1.1 132.207,119.761 136.477,115.491 v3(136.477,112.351) ; v1(129.54,100.076) 130.087,100.076 131.462,101.451 U1.15 ; VR1.5 131.572,68.707 VR1.6 ; v1(135.89,29.337) C8.2 ; R2.1 136.754,82.171 136.168,82.756 132.755,82.756 D2.1 132.422,76.415 VR1.6 ; Q2.2 141.299,57.008 141.299,58.622 v1(141.351,58.674) ; U1.38@146.414,119.737 149.455,119.737 v1(149.479,119.761) ; M2.3 M2.3@148.242,28.354 ; R10.1 v1(148.717,62.103) ; v1(150.622,81.915) C5.2 ; v1(156.591,51.181) 156.643,51.129 156.643,50.316 157.302,49.657 C9.2 ; v1(157.861,65.024) C2.2 ; v1(159.893,86.487) C6.2 ; C3.2 165.273,57.333 166.673,57.333 167.259,56.747 v1(167.259,53.467) ; D3.2 v1(167.894,65.659) ; v1(165.481,80.518) D6.2 ; v1(171.45,89.789) 171.502,89.841 174.698,89.841 Servo2.1 ; v1(171.577,99.187) Servo1.1 ; Servo5.1 Servo5.1@174.815,61.953 ; 5V.2@174.815,57.848 5V.2
  other v1: 122.555,86.233
IO0: FLASH.1 R15.2 U1.25 | length 50.9
  Top Layer w0.25: U1.25@145.968,103.188 146.418,103.188 148.971,100.635 v1(148.971,100.584)
  Top Layer w1: v1(161.544,123.317) FLASH.1@161.544,125.476 ; R15.2 v2(171.958,119.253)
  Bottom Layer w0.25: v1(148.971,100.584) 151.56,100.584 152.146,101.17 152.146,115.062 160.401,123.317 v1(161.544,123.317) 162.687,123.317 165.1,120.904 167.386,120.904 169.037,119.253 v2(171.958,119.253)
IO4: R9.2 R10.2 U1.26 | length 57.4
  Top Layer w1: R9.2 R10.2 145.517,61.697 v1(150.495,66.675) ; U1.26 149.225,104.521 v1(153.416,100.33)
  Bottom Layer w1: v1(150.495,66.675) 154.305,70.485 154.305,99.441 v1(153.416,100.33)
IO5: R12.1 U1.29 | length 69.8
  Top Layer w0.25: U1.29@145.969,108.267 149.542,108.267 v1(149.606,108.204)
  Top Layer w1: R12.1 162.636,53.391 162.636,56.845 v1(162.687,56.896)
  Bottom Layer w0.25: v1(149.606,108.204) 149.606,103.759 146.575,100.728 146.575,73.969 146.304,73.698 146.304,67.945 156.083,58.166 161.417,58.166 v1(162.687,56.896)
IO12: D8.2 R8.2 U1.14 | length 109.8
  Top Layer w0.25: U1.14@128.968,103.188 128.177,103.188 127.332,103.188 126.746,102.602 126.746,99.06 127,98.806 144.653,98.806 147.32,96.139 147.32,72.898 156.337,63.881 156.337,57.912 153.289,54.864 153.289,51.943 150.368,49.022 146.128,49.022 145.542,49.608 R8.2 ; v1(143.002,49.403) v1@143.1,49.501
  Top Layer w1: v1@128.016,50.671 128.068,50.619 128.068,49.805 128.743,49.129 129.401,49.129 129.441,49.089 D8.2 ; v1@143.1,49.501 143.1,50.178 143.679,50.758 R8.2
  VCC w1: v1(128.016,50.673) 133.731,50.673 135.89,48.514 142.313,48.514 143.002,49.203 v1(143.002,49.403)
IO13: Pantalla.3 TPD24.1 U1.16 | length 38.6
  Top Layer w0.25: v1(132.715,99.695) 132.724,99.704 132.724,101.464 U1.16@132.715,101.473
  Top Layer w1: Pantalla.3 TPD24.1 103.759,100.965 v1(104.267,100.457)
  Bottom Layer w0.25: v1(104.267,100.457) 125.857,100.457 128.651,97.663 131.699,97.663 132.831,98.795 132.831,99.045 132.82,99.056 132.82,99.59 v1(132.715,99.695)
IO14: Pantalla.1 TPD10.1 U1.13 | length 40.6
  Top Layer w0.25: v1(122.682,102.235) 122.734,102.287 123.369,102.287 125.54,104.458 U1.13@128.968,104.458
  Top Layer w1: v1(98.806,108.839) Pantalla.1 101.219,106.045 TPD10.1
  Bottom Layer w0.25: v1(98.806,108.839) 103.759,108.839 110.363,102.235 v1(122.682,102.235)
IO15: U1.23
IO16: Servo1.3 TPD5.1 U1.27 | length 29.4
  Top Layer w0.25: U1.27@145.968,105.728 153.606,105.728 155.067,104.267 Servo1.3
IO17: Servo2.3 TPD6.1 U1.28 | length 44.9
  Top Layer w0.25: U1.28@145.968,106.998 157.29,106.998 TPD6.1 158.75,107.442 159.512,106.68 176.149,106.68 177.292,105.537 177.292,95.751 176.706,95.166 174.943,95.166 Servo2.3
IO18: Servo3.3 TPD7.1 U1.30 | length 58.8
  Top Layer w0.25: U1.30@145.968,109.538 148.019,109.538 148.844,110.363 160.528,110.363 TPD7.1 ; TPD7.1@161.29,109.728 162.941,109.728 164.719,107.95 177.038,107.95 178.562,106.426 178.562,86.267 177.976,85.682 Servo3.3
IO19: Servo4.3 TPD8.1 U1.31 | length 70.9
  Top Layer w0.25: U1.31@145.968,110.808 146.018,110.858 147.307,110.858 148.082,111.633 172.974,111.633 TPD8.1 177.673,109.347 179.832,107.188 179.832,78.105 178.116,76.389 Servo4.3
IO21: Servo5.3 TPD9.1 U1.33 | length 83
  Top Layer w0.25: U1.33@145.968,113.348 171.704,113.348 175.196,113.348 181.102,107.442 181.102,69.342 178.856,67.096 Servo5.3
IO22: TPD20.1 U1.36 Ultra1.2 | length 259.9
  Top Layer w0.25: v2(95.504,37.211) 95.504,51.289 96.031,51.816 100.203,51.816 101.219,52.832 101.219,56.896 102.489,58.166 v2(106.553,58.166) ; TPD20.1 103.227,83.288 98.977,83.288 Ultra1.2 97.047,83.263 96.901,83.117 96.901,65.17 97.047,65.024 102.743,65.024 105.283,62.484 v2(105.283,60.452) ; U1.36 146.24,117.157 160.845,117.157 v2(160.909,117.094)
  Bottom Layer w0.25: v2(95.504,37.211) 96.901,35.814 115.697,35.814 120.65,30.861 129.032,30.861 134.366,25.527 167.767,25.527 170.434,28.194 170.434,53.594 171.196,54.356 171.196,62.484 169.926,63.754 169.926,72.517 171.958,74.549 171.958,78.994 169.418,81.534 169.418,108.585 v2(160.909,117.094) ; v2(105.283,60.452) 106.553,59.182 v2(106.553,58.166)
IO23: TPD19.1 U1.37 Ultra2.2 | length 246.2
  Top Layer w0.25: v2(96.393,34.671) 96.351,34.713 96.351,50.25 97.282,51.181 101.092,51.181 101.854,51.943 101.854,56.515 102.489,57.15 v2(108.458,57.15) ; Ultra2.2 TPD19.1@103.241,70.114 ; TPD19.1 103.251,66.697 103.632,66.316 v2(103.632,66.167) ; U1.37 146.24,118.554 159.321,118.554 v2(159.385,118.618)
  Top Layer w1: TPD19.1@103.241,70.114 TPD19.1
  Bottom Layer w0.25: v2(96.393,34.671) 96.542,34.671 97.05,35.179 115.316,35.179 120.269,30.226 128.905,30.226 134.112,25.019 168.275,25.019 170.942,27.686 170.942,53.086 171.704,53.848 171.704,62.738 170.561,63.881 170.561,72.39 172.466,74.295 172.466,79.375 169.926,81.915 169.926,111.506 162.814,118.618 v2(159.385,118.618) ; v2(103.632,66.167) 103.634,66.165 103.634,65.392 103.886,65.14 103.886,64.135 108.839,59.182 108.839,57.571 108.458,57.19 v2(108.458,57.15)
IO25: TPD18.1 U1.10 Ultra3.2 | length 72.4
  Top Layer w0.25: Ultra3.2 100.663,58.674 105.156,58.674 111.506,65.024 111.506,95.123 115.062,98.679 TPD18.1 115.062,106.026 115.589,106.553 121.666,106.553 123.444,108.331 U1.10
IO26: TPD17.1 U1.11 Ultra4.2 | length 107.9
  Top Layer w0.25: Ultra4.2 99.016,43.752 101.536,43.752 103.124,45.339 103.124,46.589 103.124,55.118 103.378,55.372 107.442,55.372 109.347,53.467 120.699,53.467 122.682,55.45 122.682,61.849 120.904,63.627 113.157,63.627 112.776,64.008 112.776,94.742 116.598,98.564 116.649,98.564 116.891,98.806 TPD17.1 117.145,98.857 117.145,105.01 117.291,105.156 122.174,105.156 124.079,107.061 U1.11
IO27: Pantalla.2 TPD11.1 U1.12 | length 48.4
  Top Layer w0.25: v1(121.158,103.632) 122.809,103.632 124.905,105.728 U1.12@128.968,105.728
  Top Layer w1: v1(98.806,110.617) 97.663,110.617 96.647,109.601 96.647,104.267 97.409,103.505 101.981,103.505 TPD11.1
  Bottom Layer w0.25: v1(98.806,110.617) 103.886,110.617 110.871,103.632 v1(121.158,103.632)
IO32: U1.8 U2.7 | length 184.8
  Top Layer w0.25: v1(112.522,109.22) 112.595,109.22 112.992,109.617 121.174,109.617 122.365,110.808 128.177,110.808 U1.8@128.968,110.808
  Top Layer w1: U2.7 156.899,30.353 157.026,30.226 v1(157.099,30.226)
  Bottom Layer w0.25: v1(112.522,109.22) 112.449,109.22 111.847,108.618 110.203,108.618 104.521,114.3 95.836,114.3 95.25,113.714 95.25,65.864 95.836,65.278 100.838,65.278 102.489,63.627 102.489,56.72 103.075,56.134 108.585,56.134 110.998,53.721 121.031,53.721 128.651,46.101 128.651,32.385 135.001,26.035 158.369,26.035 158.623,26.289 158.623,29.559 158.008,30.174 157.151,30.174 v1(157.099,30.226)
IO33: U1.9 U2.8 | length 168.6
  Top Layer w0.25: v1(113.538,107.95) 113.665,108.077 121.135,108.077 122.596,109.538 U1.9@128.968,109.538
  Top Layer w1: U2.8 v1(156.972,27.813)
  Bottom Layer w0.25: v1(113.538,107.95) 113.465,107.95 112.703,107.188 109.855,107.188 104.185,112.858 97.491,112.858 96.647,112.014 96.647,91.694 97.917,90.424 108.331,90.424 121.539,77.216 121.539,55.118 130.175,46.482 130.175,31.877 135.509,26.543 156.559,26.543 156.92,26.904 156.92,27.761 v1(156.972,27.813)
IO34: U1.6 Ultra1.3 | length 51.8
  Top Layer w0.25: Ultra1.3 104.375,85.803 104.521,85.95 104.521,96.012 110.109,101.6 110.109,110.617 111.125,111.633 119.888,111.633 121.666,113.411 U1.6
IO35: U1.7 Ultra2.3 | length 63.1
  Top Layer w0.25: Ultra2.3 103.867,72.654 104.013,72.8 104.013,79.248 105.283,80.518 105.283,95.631 110.998,101.346 110.998,109.728 111.76,110.49 120.396,110.49 122.047,112.141 U1.7
IO36: U1.4 Ultra3.3 | length 92.1
  Top Layer w0.25: Ultra3.3 95.563,59.504 95.25,59.817 95.25,114.554 96.647,115.951 U1.4
IO39: U1.5 Ultra4.3 | length 114.7
  Top Layer w0.25: Ultra4.3 102.216,46.355 102.362,46.501 102.362,56.007 102.616,56.261 107.569,56.261 109.728,54.102 120.396,54.102 122.047,55.753 122.047,61.595 120.65,62.992 112.395,62.992 112.141,63.246 112.141,94.869 115.57,98.298 115.57,100.33 116.332,101.092 v2(116.332,105.537) ; v2(116.332,112.903) 119.38,112.903 121.158,114.681 U1.5
  Bottom Layer w0.25: v2(116.332,105.537) v2(116.332,112.903)
Net12V_1: 12V.1 BMS.1 D11.1 Q3.1 Q3.3 R11.1 TPD25.1 | length 70.2
  Top Layer w1: TPD25.1 R11.1 v1(108.077,50.673) ; v1(106.084,43.981) 106.084,38.666 D11.1 108.634,39.116 109.22,38.53 v1(109.22,34.163) ; Q3.1 v1(119.239,46.341) ; Q3.3 v1(119.239,50.941) ; BMS.1@122.734,27.611 BMS.1
  VCC w1: v1(106.084,43.981) 106.136,44.033 107.152,44.033 108.077,44.958 ; v1@108.129,50.725 v1(108.077,50.673) 108.077,44.958 ; v1(109.22,34.163) 111.936,34.163 112.522,33.577 12V.1 113.522,29.829 114.472,29.829 114.488,29.845 115.316,29.845 117.348,27.813 BMS.1 ; v1@119.187,50.993 v1(119.239,50.941) v1(119.239,46.341) 119.187,46.289 119.187,45.019 117.856,43.688 109.347,43.688 108.077,44.958
NetD1_1: D1.1 R1.1 | length 4.1
  Top Layer w1: D1.1 R1.1
NetD2_2: D2.2 L1.1 VR1.2 | length 53.3
  Top Layer w1: v1(122.428,81.28) 124.422,81.28 125.222,82.08 D2.2 ; VR1.2 126.468,62.586 126.468,58.317 v1(126.492,58.293) ; v1(139.827,61.214) 139.827,61.287 140.621,62.081 140.621,63.747 141.771,64.897 L1.1
  VCC w1: v1(122.428,81.28) 122.379,81.28 121.793,80.694 121.793,62.992 127,57.785 136.398,57.785 v1(139.827,61.214)
NetD3_1: D3.1 R4.1 | length 4.2
  Top Layer w1: D3.1 165.544,67.691 165.544,71.691 R4.1
NetD4_1: D4.1 R5.1 | length 3.9
  Top Layer w1: D4.1 R5.1
NetD6_1: D6.1 R6.1 | length 4
  Top Layer w1: D6.1 165.608,84.836 R6.1
NetD8_1: D8.1 D9.1 Pulsador.1 TPD23.1 | length 15
  Top Layer w1: D9.1 D8.1 135.086,49.064 135.763,48.387 139.954,48.387 138.938,47.371 TPD23.1 ; 140.208,48.387 140.208,50.546 Pulsador.1
NetD9_2: D9.2 D10.2 Q1.1 R7.1 | length 49.9
  Top Layer w1: Q1.1 116.999,55.873 119.119,55.873 v1(119.126,55.88) ; v1(126.746,55.626) 126.819,55.626 126.946,55.499 D10.2 D9.2 ; R7.1 151.765,47.117 152.781,48.133 v1(152.781,49.022)
  VCC w1: v1(119.126,55.88) 119.199,55.88 119.453,55.626 143.637,55.626 150.241,49.022 v1(152.781,49.022)
NetD10_1: D10.1 Q2.3 | length 6.4
  Top Layer w1: D10.1 136.017,55.499 136.525,56.007 137.033,56.007 Q2.3
NetM0_2: M0.2 U2.2 | length 12
  Top Layer w1: M0.2 145.733,38.291 145.733,39.815 147.193,41.275 151.257,41.275 152.911,42.929 154.435,42.929 U2.2
NetM1_2: M1.2 U2.3 | length 14.4
  Top Layer w1: M1.2 145.643,33.185 145.643,34.974 146.229,35.56 150.114,35.56 152.4,37.846 152.4,39.927 152.986,40.513 U2.3
NetM2_2: M2.2 U2.4 | length 16.4
  Top Layer w1: M2.2 145.542,30.148 146.128,30.734 151.003,30.734 152.4,32.131 152.4,35.814 U2.4
NetQ2_1: Q2.1 R9.1 | length 10.5
  Top Layer w1: Q2.1 141.803,55.047 143.637,53.213 148.082,53.213 148.717,53.848 R9.1
NetR2_2: R2.2 R3.1 VR1.4 | length 39
  Top Layer w1: VR1.4 129.86,62.594 129.86,60.222 130.446,59.636 133.931,59.636 134.745,60.45 134.745,61.466 v1(134.747,61.468) ; R2.2 140.129,80.312 140.129,81.709 141.328,82.908 143.716,82.908 R3.1 ; R2.2@139.954,80.312 140.129,80.137 v1(141.605,80.137)
  VCC w1: v1(134.747,61.468) 134.747,74.868 140.016,80.137 v1(141.605,80.137)
NetR12_2: R12.2 R13.2 U2.1 | length 19
  Top Layer w1: R13.2 151.257,43.434 152.146,44.323 152.146,44.936 152.732,45.522 154.488,45.522 U2.1 154.559,52.324 155.575,53.34 R12.2
NetStepMotor_1: StepMotor.1 TPD13.1 U2.12 | length 8.7
  Top Layer w1: U2.12 170.561,35.433 171.323,36.195 StepMotor.1
NetStepMotor_2: StepMotor.2 TPD14.1 U2.11 | length 19.9
  Top Layer w1: U2.11 167.298,32.932 169.584,32.932 170.561,33.909 178.328,33.909 179.451,35.032 179.451,37.471 178.258,38.664 175.712,38.664 StepMotor.2
NetStepMotor_3: StepMotor.3 TPD15.1 U2.13 | length 13.6
  Top Layer w1: U2.13 170.561,41.275 179.324,41.275 TPD15.1
NetStepMotor_4: StepMotor.4 TPD16.1 U2.14 | length 13.6
  Top Layer w1: U2.14 170.561,43.815 StepMotor.4 ; StepMotor.4@175.768,43.815 178.943,43.815 TPD16.1
RXD0: FTDI-USBtoSerial.2 U1.34 | length 30.7
  Top Layer w0.25: U1.34@145.968,114.618 163.259,114.618 167.513,118.872 FTDI-USBtoSerial.2@167.513,126.304
TXD0: FTDI-USBtoSerial.1 U1.35 | length 27.4
  Top Layer w0.25: U1.35@145.968,115.888 154.087,115.888 154.102,115.873 161.72,115.873 164.973,119.126 FTDI-USBtoSerial.1@164.973,126.133
pads on no net: T1.1 T2.1 T3.1 T4.1 U1.17 U1.18 U1.19 U1.20 U1.21 U1.22 U1.24 U1.32 U2.10

## Polygon pours and split planes (outlines as drawn)
Net12V_1 on VCC "NET12V_1_L03_P004" (solid, pour order 4): 119.888,51.689 120.396,51.181 120.396,45.085 118.237,42.926 105.029,42.926 105.029,45.339 106.934,45.339 107.315,45.72 107.315,51.689
3V3 on VCC "NONET_L03_P-001" (solid, pour order 2): 138.684,31.496 138.684,29.21 151.003,29.21 151.384,28.829 151.384,24.892 160.782,24.892 160.782,46.482 161.036,46.482 179.578,46.482 179.578,112.522 178.689,113.411 163.449,113.411 158.496,108.458 158.496,98.679 128.524,98.679 127.635,99.568 127.635,120.396 123.952,120.396 122.809,120.396 122.809,120.269 122.809,97.663 129.667,90.805 165.862,90.805 167.513,92.456 167.513,105.41 175.641,105.41 176.276,104.775 176.149,104.648 176.149,49.53 162.941,49.53 158.496,53.975 150.241,53.975 150.241,51.435 151.638,50.038 155.448,50.038 155.448,31.75 144.399,31.75 144.399,40.132 140.97,40.132 139.446,38.608 139.446,33.528 138.684,32.766
IO12 on VCC "IO12_L03_P029" (solid, pour order 29): 141.605,49.022 136.398,49.022 133.858,51.562 126.873,51.562 126.873,48.006 130.556,48.006 130.556,50.038 133.477,50.038 135.763,47.752 142.621,47.752 144.018,49.149 142.875,50.292
5V on VCC "NONET_L03_P-001" (solid, pour order 1): 100.711,47.879 100.711,51.054 102.743,53.086 102.743,86.106 106.553,89.916 106.807,89.662 120.523,89.662 128.778,81.407 145.161,81.407 145.161,80.645 149.987,75.819 163.83,75.819 163.83,71.882 163.83,56.896 166.243,54.483 171.196,54.483 172.847,56.134 172.847,102.235 171.323,103.759 168.275,103.759 167.132,102.616 167.132,88.392 164.973,86.233 129.921,86.233 129.921,88.138 119.888,98.171 99.441,98.171 95.123,93.853 95.123,47.879
3V3 on VCC "3V3_L03_P036" (solid, pour order 36): 179.578,112.522 179.578,117.856 176.657,117.856 176.657,112.522
BUTTON12V on VCC "BUTTON12V_L03_P034" (solid, pour order 34): 120.904,72.771 120.904,78.486 117.094,78.486 116.84,78.74 116.84,80.264 113.665,80.264 113.157,79.756 104.394,79.756 104.394,62.865 105.537,61.722 119.507,61.722 123.571,57.658 123.571,57.023 125.349,57.023 125.349,58.166 119.888,63.627 106.807,63.627 106.045,64.389 106.045,72.771 106.172,72.771 106.807,72.771
NetR2_2 on VCC "NETR2_2_L03_P031" (solid, pour order 31): 142.113,78.74 142.113,81.153 139.192,81.153 133.985,75.946 133.985,60.198 136.017,60.198 136.017,74.676 140.081,78.74
NetD9_2 on VCC "NETD9_2_L03_P028" (solid, pour order 28): 153.162,48.514 153.543,48.895 153.543,49.784 151.003,49.784 144.145,56.642 115.824,56.642 115.824,54.864 142.367,54.864 148.717,48.514
3V3 on VCC "3V3_L03_P006" (solid, pour order 6): 153.162,31.496 153.162,36.576 157.861,36.576 158.496,35.941 158.496,31.496
12V on VCC "12V_L03_P005" (solid, pour order 5): 167.894,50.927 167.894,52.324 161.544,52.324 157.861,56.007 150.749,56.007 149.098,54.356 149.098,52.07 151.13,50.038 153.797,50.038 153.797,48.895 153.162,48.26 143.256,48.26 140.589,45.593 135.382,45.593 135.382,46.736 134.874,47.244 131.953,47.244 131.953,44.577 128.143,44.577 127.508,45.212 124.587,45.212 124.587,49.276 119.126,54.737 115.57,54.737 115.57,57.277 115.697,57.404 120.523,57.404 120.523,60.325 119.38,61.468 114.554,61.468 113.157,60.071 113.157,54.356 114.935,52.578 119.253,52.578 121.92,49.911 121.92,46.355 115.951,40.386 115.951,37.846 117.729,37.846 118.745,37.846 119.38,37.846 138.684,37.846 138.684,39.624 144.272,45.212 150.749,45.212 152.4,46.863 155.321,46.863 155.321,50.419 154.051,51.689 151.257,51.689 150.495,52.451 150.495,53.721 151.13,54.356 157.607,54.356 161.036,50.927
Net12V_1 on VCC "NET12V_1_L03_P003" (solid, pour order 3): 108.077,34.036 110.363,31.75 110.363,26.924 110.49,26.797 115.443,26.797 115.951,26.289 123.952,26.289 123.952,29.21 120.142,29.21 114.046,35.306 108.077,35.306
5V on Top Layer "5V_L01_P027" (solid, pour order 27): 112.014,97.409 109.728,95.123 109.728,90.932 105.791,90.932 105.791,95.25 109.347,98.806 112.014,98.806
BUTTON12V on Top Layer "BUTTON12V_L01_P026" (solid, pour order 26): 108.966,74.168 108.966,79.883 105.41,79.883 104.394,78.867 104.394,76.073 105.791,74.676 105.791,74.168
Net12V_1 on Top Layer "NET12V_1_L01_P025" (solid, pour order 25): 108.839,49.53 104.267,49.53 104.267,54.737 106.934,54.737 108.839,52.832
12V on Top Layer "12V_L01_P024" (solid, pour order 24): 168.656,44.577 168.656,47.244 168.021,47.879 168.021,51.943 165.862,51.943 165.862,51.054 161.417,51.054 161.417,44.577
3V3 on Top Layer "3V3_L01_P023" (solid, pour order 23): 176.276,49.276 170.561,49.276 170.053,49.784 168.783,49.784 168.783,48.133 170.053,46.863 176.276,46.863
NetD3_1 on Top Layer "NETD3_1_L01_P021" (solid, pour order 21): 163.322,72.771 167.64,72.771 167.64,66.802 163.322,66.802
GND on Top Layer "GND_L01_P020" (solid, pour order 20): 176.149,72.39 168.021,72.39 168.021,66.421 162.814,66.421 162.814,71.882 152.527,71.882 152.527,68.58 156.972,64.135 169.799,64.135 169.799,66.04 173.101,69.342 176.149,69.342
GND on Top Layer "GND_L01_P019" (solid, pour order 19): 147.828,80.899 147.828,89.154 156.337,89.154 157.099,89.916 162.941,89.916 162.941,83.693 167.132,83.693 167.132,79.375 164.084,79.375 164.084,81.534 152.146,81.534 152.146,80.899
GND on Top Layer "GND_L01_P018" (solid, pour order 18): 126.365,86.741 126.365,89.154 113.919,89.154 113.919,83.566 121.407,83.566 124.581,86.74
3V3 on Top Layer "3V3_L01_P017" (solid, pour order 17): 144.78,90.996 144.78,96.266 143.256,97.79 123.825,97.79 123.825,90.932
12V on Top Layer "12V_L01_P016" (solid, pour order 16): 111.252,35.56 111.252,44.069 120.65,44.069 122.174,45.593 124.968,45.593 126.111,44.45 131.445,44.45 131.445,38.1 117.983,38.1 117.983,35.56
NetR12_2 on Top Layer "NETR12_2_L01_P015" (solid, pour order 15): 160.655,51.943 160.655,54.737 154.559,54.737 153.797,53.975 153.797,47.879 150.876,44.958 147.701,44.958 147.701,42.037 150.749,42.037 153.162,44.45 156.083,44.45 156.083,50.165 155.702,50.546 155.702,51.562 156.083,51.943
3V3 on Top Layer "3V3_L01_P014" (solid, pour order 14): 146.812,42.418 146.809,42.421 146.809,44.865 142.02,44.865 141.224,44.069 141.224,34.163 139.192,32.131 139.192,26.289 144.272,26.289 144.272,39.878 146.431,42.037 146.812,42.037
12V on Top Layer "12V_L01_P013" (solid, pour order 13): 140.589,38.1 131.064,38.1 131.191,38.227 131.191,47.371 135.636,47.371 136.779,46.228 136.779,44.069 140.589,44.069
NetD8_1 on Top Layer "NETD8_1_L01_P012" (solid, pour order 12): 139.319,52.197 139.319,49.022 136.398,49.022 135.255,50.165 135.255,53.213 132.08,53.213 132.08,47.752 136.144,47.752 137.16,46.736 137.16,45.593 140.716,45.593 140.716,46.863 141.732,47.879 141.732,52.197
5V on Top Layer "5V_L01_P011" (solid, pour order 11): 136.271,73.025 146.812,73.025 146.812,80.899 142.748,80.899 142.748,78.232 136.271,78.232
NetR2_2 on Top Layer "NETR2_2_L01_P010" (solid, pour order 10): 142.24,78.359 142.24,81.661 142.494,81.915 145.288,81.915 145.288,84.201 145.415,84.328 141.859,84.328 138.938,81.407 138.938,78.359
5V on Top Layer "5V_L01_P009" (solid, pour order 9): 176.403,74.93 171.323,74.93 167.386,78.867 163.576,78.867 163.576,81.153 152.527,81.153 152.527,72.898 162.687,72.898 163.195,73.406 170.053,73.406 170.688,72.771 176.403,72.771
3V3 on Top Layer "3V3_L01_P008" (solid, pour order 8): 166.878,90.424 155.829,90.424 155.829,89.789 147.828,89.789 147.828,95.377 166.878,95.377
GND on GND (split plane): 181.724,24.542 94.744,24.542 94.744,128.522 181.724,128.522

## Silkscreen, mask and mechanical layers (free items; w line width, h text height)
Top Overlay:
  text "GND" at 169.291,122.809 h0.76
  text "GND" at 103.886,121.92 h0.76 r90
  text "Angie Martinez - Wilson Rodriguez" at 180.213,117.221 h0.76 r270
  text "GND" at 176.911,99.695 h0.76 r270
  text "GND" at 96.012,99.314 h0.76 r270
  text "5V" at 96.012,96.266 h0.76 r270
  text "GND" at 176.911,90.424 h0.76 r270
  text "GND" at 176.911,81.407 h0.76 r270
  text "GND" at 176.911,72.136 h0.76 r270
  text "GND" at 96.139,68.453 h0.76 r270
  text "GND" at 176.911,62.738 h0.76 r270
  text "GND" at 177.673,56.769 h0.76 r90
  text "GND" at 96.139,54.991 h0.76 r270
  text "GND" at 177.673,50.038 h0.76 r90
  text "GND" at 135.89,49.911 h0.51 r90
  text "GND" at 96.139,42.037 h0.76 r270
  text "GND" at 169.164,28.702 h0.76 r270
  text "12V" at 121.666,25.146 h0.76
  text "GND" at 124.587,25.146 h0.76
Mechanical 1:
  lines w0.254: 94.361,24.13 182.118,24.13 182.118,128.905 94.361,128.905 94.361,24.13

## Text inside footprints (layer, text, board x,y; h text height)
12V: Top Overlay "GND" at 104.394,27.559 h0.76 r90